# Altium PCB ir-kh.PcbDoc
Units mm, origin at the board's own origin, x right, y up, seen from the top; angles counter-clockwise.
Board outline 151 x 86.38 mm, 2 copper layers (Top Layer, Bottom Layer); 24 components, 20 nets, 69 pads, 0 vias.
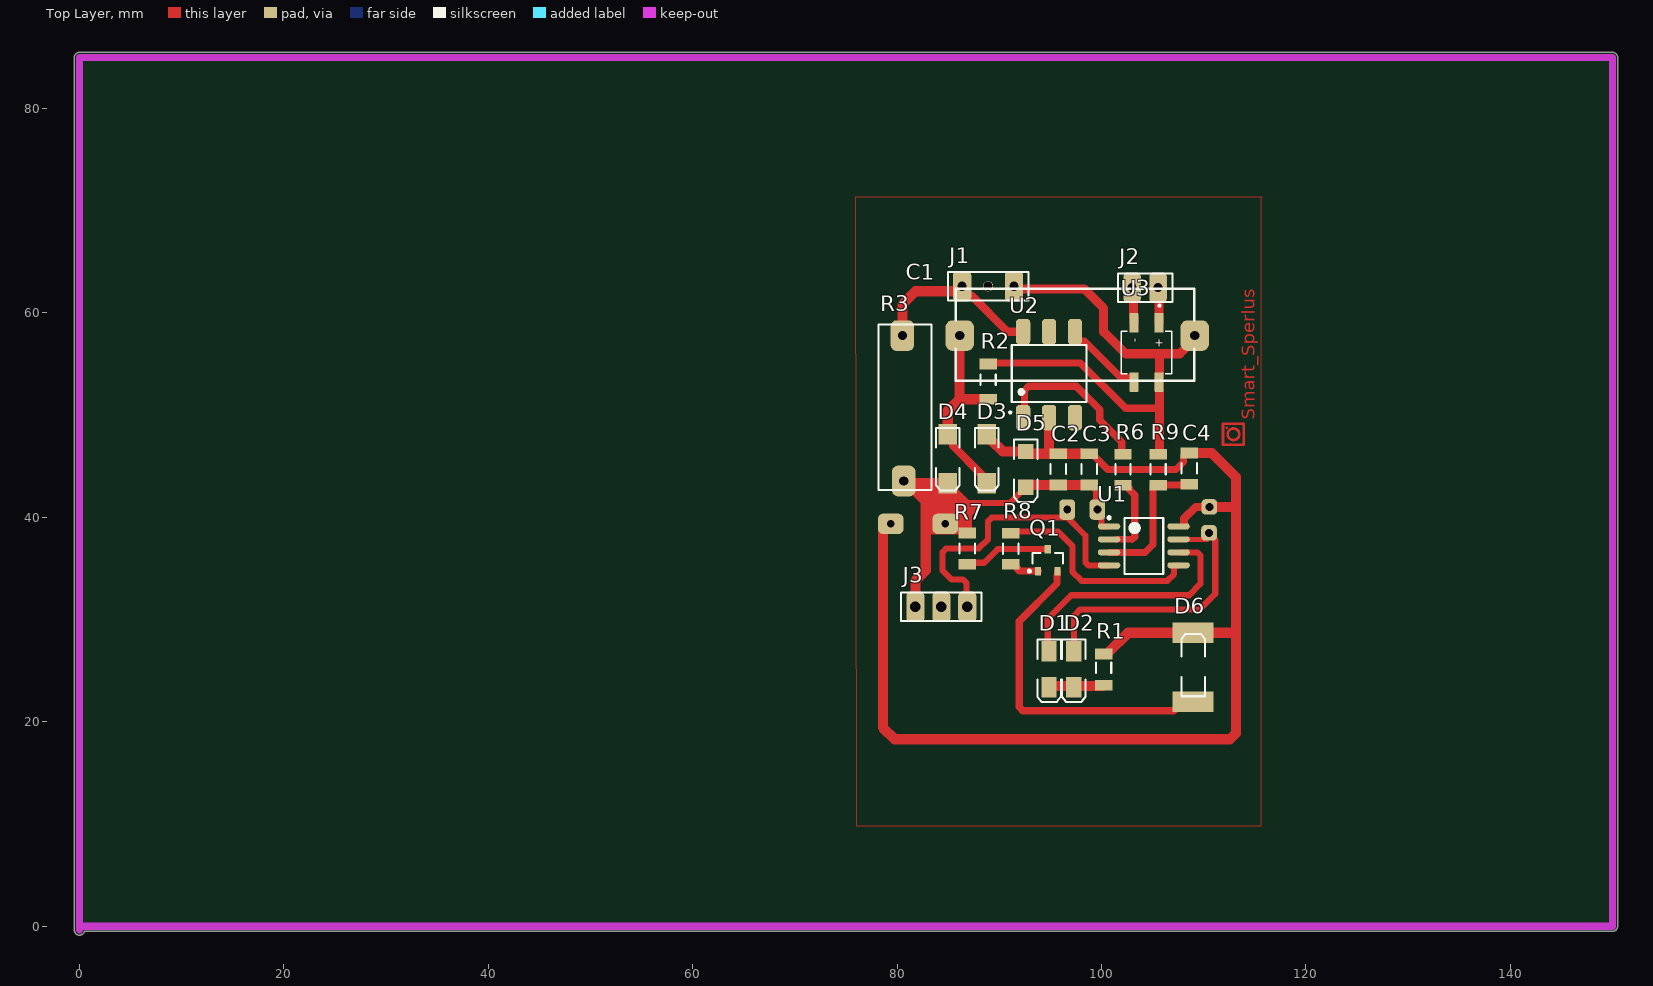
[diagram p0: Top Layer view]
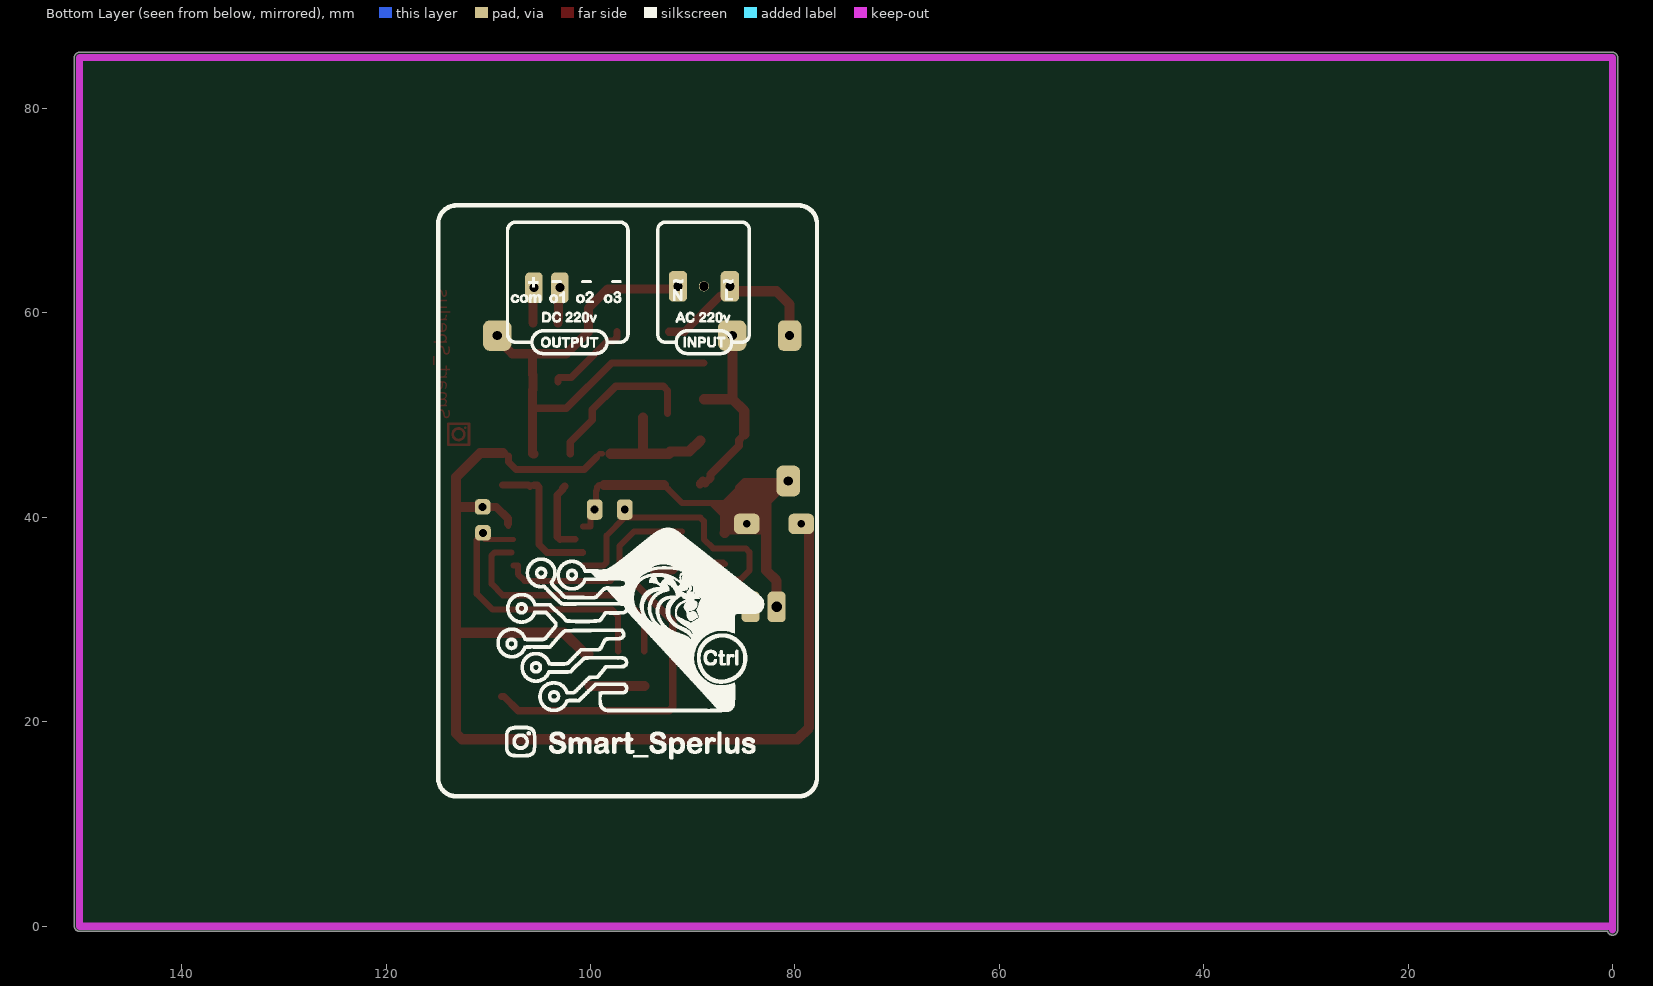
[diagram p1: Bottom Layer view, seen from below]
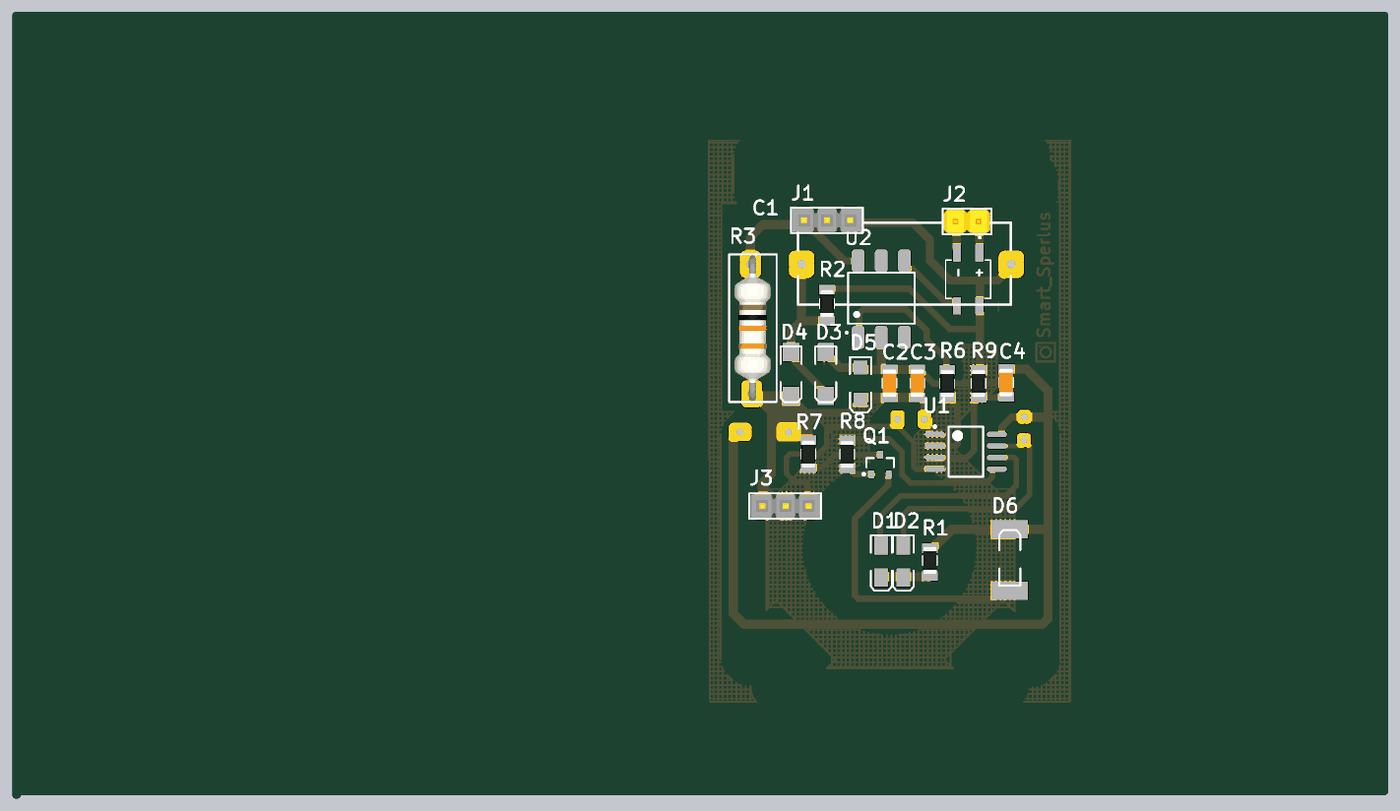
[diagram p2: 3D render of the assembled board from above, using the file's embedded part models]

## Layer stack, top to bottom
Top Solder: solder mask 0.0102, Solder Resist, Dk 3.5
Top Layer: signal copper 0.0356
Dielectric 1: dielectric 0.32, FR-4, Dk 4.8
Bottom Layer: signal copper 0.0356
Bottom Solder: solder mask 0.0102, Solder Resist, Dk 3.5

## Board outline
-0.5,-0.381 -0.5,85 cw(c0,85) 0,85.5 150,85.5 cw(c150,85) 150.5,85 150.5,0 cw(c150,0) 150,-0.5 0.486,-0.5 cw(c0,-0.381)

## Design rules (kind name [scope] priority, off if disabled: settings)
Clearance Clearance_1 [InPolygon] p1: gap=1 ignorepadtopadclearanceinfootprint=FALSE
Clearance [All] p2: gap=0.6 ignorepadtopadclearanceinfootprint=FALSE
PolygonConnect [All] p1: connectstyle=Relief reliefconductorwidth=0.254 reliefentries=4 polygonreliefangle="90 Angle" airgapwidth=0.254
RoomDefinition ir-kh [InComponentClass('ir-kh')] p1: confinementstyle=ConfineIn formatcopy=TRUE lockcomponents=FALSE outline 144.907,-4.953 247.904,-4.953 247.904,23.114 144.907,23.114
RoutingLayers [All] p1: top layer_v5=FALSE bottom layer_v5=TRUE
RoutingVias [All] p1: holewidth=0.711 width=2.5 viastyle="Through Hole" minholewidth=0.711 minwidth=1.27 maxholewidth=0.711 maxwidth=2
SolderMaskExpansion [All] p1: expansion=0.102 istentingtop=FALSE
Width [All] p1: maxlimit=3 minlimit=0.5 preferedwidth=1
29 further rules are at their usual default settings.

## Components (designator, comment, footprint, x,y, rotation, side; value= is the part's Value field where it differs from the comment)
C1 "1uf 400v" "1uf 400v" 109.728,62.357 r180 top value=1uF
C2 "=Value" "CAP 1206"#1 95.758,44.704 r90 top
C3 "=Value" "CAP 1206"#1 98.806,44.704 r90 top
C4 "=Value" "CAP 1206"#2 108.585,44.831 r270 top
D1 "LED2" 3.2X1.6X1.1#1 94.869,25.146 r270 top
D2 "LED2" 3.2X1.6X1.1#1 97.282,25.146 r270 top
D3 "D Tunnel1" 3.2X1.6X1.1#2 88.773,45.847 r270 top
D4 "D Tunnel1" 3.2X1.6X1.1#2 84.963,45.847 r270 top
D5 "D Tunnel1" 3.2X1.6X1.1#3 92.583,44.704 r270 top
D6 "LED2" 3.2X1.6X1.1#4 108.966,25.4 r90 top
J1 "Header3X1" "HEADER 3X1"#1 86.36,62.611 r0 top
J2 "Header2X1" "Header 2X1" 104.267,62.484 r0 top
J3 "Header3X1" "HEADER 3X1"#2 81.788,31.242 r0 top
Q1 "QNPN" SOT-23B_L 94.742,35.814 r90 top
R1 "10K" "RES 1206 (3216X08L)"#1 100.203,25.273 r90 top
R2 "10K" "RES 1206 (3216X08L)"#2 88.9,53.467 r270 top
R3 "10K" Res-(2/1) 80.772,60.071 r270 top
R6 "10K" "RES 1206 (3216X08L)"#3 102.108,44.704 r270 top
R7 "10K" "RES 1206 (3216X08L)"#4 86.868,36.957 r90 top
R8 "10K" "RES 1206 (3216X08L)"#4 91.114,36.921 r270 top
R9 "10K" "RES 1206 (3216X08L)"#3 105.537,44.704 r270 top
U1 "ATtiny15L-1SC" 8S2_N 104.14,37.211 r0 top
U2 "K3021P" DIP762W50P254L730H410Q6 94.869,54.068 r90 top
U3 "MB6S" SOIC245P670X270-4N 104.394,56.134 r270 top

## Footprints (in the part's own frame and the unit in brackets; to place one, negate y for a bottom-side part, rotate by r counter-clockwise, add the part's x,y. Pads: shape width x height; smd on the part's side, far side on the other; paste and mask are expansions set on the pad)
"1uf 400v" [mm] "24*9mm"
  rrect50% 2.8x3 hole 0.9: 1(0.601,4.572) 2(23.601,4.572)
  silkscreen extent 0.63,0 24,9
3.2X1.6X1.1#1 [mm] "SMT LED; 2 Flat Leads"
  rect 2x1.5 smd: 1(-1.75,0) 2(1.75,0)
  silkscreen extent -2.9,-1.15 3.2,1.15
3.2X1.6X1.1#2 [mm] "SMT LED; 2 Flat Leads"
  rect 2x1.8 smd: 1(-2.296,0) 2(2.504,0)
  silkscreen extent -2.9,-1.15 3.2,1.15
3.2X1.6X1.1#3 [mm] "SMT LED; 2 Flat Leads"
  rect 1.5x1.5 smd: 1(-1.75,0) 2(1.75,0)
  silkscreen extent -2.9,-1.15 3.2,1.15
3.2X1.6X1.1#4 [mm] "SMT LED; 2 Flat Leads"
  rect 2x4 smd: 1(-3.429,0) 2(3.302,0)
  silkscreen extent -2.9,-1.15 3.2,1.15
8S2_N [mm] "SOP, 8-Leads, Body 5.3x5.3mm, Pitch 1.27mm, IPC Medium Density"
  oval 2.2x0.6 smd: 1(-3.4,1.905) 2(-3.4,0.635) 3(-3.4,-0.635) 4(-3.4,-1.905) 5(3.4,-1.905) 6(3.4,-0.635) 7(3.4,0.635) 8(3.4,1.905)
  silkscreen extent -3.52,-2.75 1.9,2.88, body extent -2.73,-2.75 2.73,2.75, height 2.16
"CAP 1206"#1 [mm]
  rect 1.05x1.7 smd: 1(-1.533,0) 2(1.517,0)
  silkscreen extent -0.47,-0.75 0.53,0.75, body extent -1.49,-0.77 1.55,0.75, height 0.75
"CAP 1206"#2 [mm]
  rect 1.05x1.7 smd: 1(-1.461,0) 2(1.589,0)
  silkscreen extent -0.47,-0.75 0.53,0.75, body extent -1.49,-0.77 1.55,0.75, height 0.75
DIP762W50P254L730H410Q6 [mm]
  rrect50% 2.5x1.4 smd: 1(-4.302,2.54) 2(-4.302,0) 3(-4.302,-2.54) 4(4.098,-2.54) 5(4.098,0) 6(4.098,2.54)
  silkscreen extent -3.9,-3.65 2.8,3.9
"Header 2X1" [mm]
  rrect50% 1.7x3 hole 0.9: 1(-1.27,0) 2(1.27,0)
  silkscreen extent -2.67,-1.4 2.67,1.4, body extent -2.54,-1.27 2.54,1.27, height 9.5
"HEADER 3X1"#1 [mm]
  rrect50% 1.8x3 hole 0.9: 1(0,0) 3(5.08,0)
  round 1 hole 0.9: 2(2.54,0)
  silkscreen extent -1.4,-1.4 6.48,1.4, body extent -1.24,-1.27 6.38,1.27, height 8.38
"HEADER 3X1"#2 [mm]
  rrect50% 1.778x3 hole 1.016: 1(0,0) 2(2.54,0) 3(5.08,0)
  silkscreen extent -1.4,-1.4 6.48,1.4, body extent -1.24,-1.27 6.38,1.27, height 8.38
"RES 1206 (3216X08L)"#1 [mm] "Chip Resistor, 2-Leads, Body 3.2x1.6mm, IPC High Density _ (0.125 W)"
  rect 1.05x1.7 smd: 1(-1.691,0) 2(1.359,0)
  silkscreen extent -0.5,-0.75 0.5,0.75, body extent -1.52,-0.76 1.53,0.76, height 0.6
"RES 1206 (3216X08L)"#2 [mm] "Chip Resistor, 2-Leads, Body 3.2x1.6mm, IPC High Density _ (0.125 W)"
  rect 1.05x1.7 smd: 1(-1.533,0) 2(1.905,0)
  silkscreen extent -0.5,-0.75 0.5,0.75, body extent -1.52,-0.76 1.53,0.76, height 0.6
"RES 1206 (3216X08L)"#3 [mm] "Chip Resistor, 2-Leads, Body 3.2x1.6mm, IPC High Density _ (0.125 W)"
  rect 1.05x1.7 smd: 1(-1.486,0) 2(1.564,0)
  silkscreen extent -0.5,-0.75 0.5,0.75, body extent -1.52,-0.76 1.53,0.76, height 0.6
"RES 1206 (3216X08L)"#4 [mm] "Chip Resistor, 2-Leads, Body 3.2x1.6mm, IPC High Density _ (0.125 W)"
  rect 1.05x1.7 smd: 1(-1.533,0) 2(1.517,0)
  silkscreen extent -0.5,-0.75 0.5,0.75, body extent -1.52,-0.76 1.53,0.76, height 0.6
Res-(2/1) [mm]
  rrect50% 3x2.3 hole 0.9: 1(2.286,-0.254) 2(16.51,-0.127)
  silkscreen extent 1.2,-2.6 17.4,2.6, body extent 1.28,-1.98 17.32,1.92, height 7.03
SOIC245P670X270-4N [mm]
  rrect23% 1.91x0.91 smd: 1(-2.9,1.225) 2(-2.9,-1.225) 3(2.9,-1.225) 4(2.9,1.225)
  silkscreen extent -4.68,-2.48 2.1,2.48
SOT-23B_L [mm] "SOT23, 3-Leads, Body 2.9x1.3mm, Pitch 0.95mm, Lead Span 2.4mm, IPC High Density"
  rect 0.85x0.6 smd: 1(-1.075,0.95) 2(-1.075,-0.95) 3(1.075,0)
  silkscreen extent -1.2,-1.5 0.7,1.92, body extent -0.7,-1.5 0.7,1.5, height 1.14

## Part data
C1: "Capacitor 24*9mm", ComponentLinkURL=www.picpars.com, Designer="Seyed Mohsen Ghasemain"
C2 C3 C4: library part Capacitor, "Capacitor"
D1 D2 D6: "Typical RED, GREEN, YELLOW, AMBER GaAs LED", LatestRevisionDate=17-Jul-2002, LatestRevisionNote="Re-released for DXP Platform.", PackageDescription="SM LED; 2 Flat Leads", PackageReference=3.2X1.6X1.1, PackageVersion=Feb-2002, Published=8-Jun-2000, Publisher="Altium Limited"
D3 D4 D5: "Tunnel Diode - RLC Model", LatestRevisionDate=17-Jul-2002, LatestRevisionNote="Re-released for DXP Platform.", PackageDescription="SM LED; 2 Flat Leads", PackageReference=3.2X1.6X1.1, PackageVersion=Feb-2002, Published=8-Jun-2000, Publisher="Altium Limited"
Q1: "NPN Bipolar Transistor", LatestRevisionDate=29-May-2009, LatestRevisionNote="IPC-7351 Footprint Added.", PackageDescription="3-Pin SOT-23 Package 0.95 mm Pitch, 2.4 mm Lead Span", PackageReference=SOT-23B, PackageVersion=Aug-1999, Published=8-Jun-2000, Publisher="Altium Limited"
R1 R2 R3 R6 R7 R8 R9: library part Resistor, "Resistor", Power="1/4 W", Tolerance=5%
U1: "8-Bit AVR Microcontroller with 1K Byte of Flash Memory", Supplier Part Number 1=ATTINY15L-1SC-ND, ComponentLink1Description=Datasheet, ComponentLink1URL=http://www.atmel.com/dyn/resources/prod_documents/doc1187.pdf, ComponentLink2Description="Atmel.com Home", ComponentLink2URL=http://www.atmel.com, DatasheetVersion=1187E-AVR-06/02, LatestRevisionDate=16-Oct-2006, LatestRevisionNote="IPC-7351 Footprint Added.", PackageDescription="8-Lead, 0.208\" Body, Plastic Small Outline Package (EIAJ)", PackageReference=8S2, PackageVersion="revF, Apr-2008", Published=17-Sep-2003, Publisher="Altium Limited", Supplier 1=Digi-Key, Supplier 2=Mouser, Supplier Part Number 2=556-ATTINY15L1SC
U2: "Optoisolator Triac Output 5300Vrms 1 Channel 6-DIP", Package="DIP-6 Vishay", Availability=Unavailable, DigiKey-Purchase-URL=https://snapeda.com/shop?store=DigiKey&id=291595, MF="Vishay Semiconductor", Mouser-Purchase-URL=https://snapeda.com/shop?store=Mouser&id=291595, MP=K3021P, Price=None, SnapEDA_Link=https://www.snapeda.com/parts/K3021P/Vishay%20Semiconductor%20Opto%20Division/view-part/291595/?ref=snap
U3: "Bridge Rectifier Single Phase Standard 600V Surface Mount 4-SOIC", Package="BESOP-4 Surge Components", Digi-Key_Part_Number=MB6SCT-ND, Digi-Key_Purchase_URL=https://www.digikey.com.tr/product-detail/en/on-semiconductor/MB6S/MB6SCT-ND/965654?utm_source=snapeda&utm_medium=aggregator&utm_campaign=symbol, MF="ON Semiconductor", MP=MB6S, SnapEDA_Link=https://www.snapeda.com/parts/MB6S/ON%20Semiconductor/view-part/2774209/?ref=snap

## Free pads (board coordinates)
  rrect50% 2.5x2 hole 0.762: 4(84.709,39.37) 5(79.375,39.37)
  rrect50% 1.524x1.524 hole 0.762: 6(110.554,41.021) 7(110.519,38.481)
  rrect50% 1.524x2 hole 0.762: 8(99.597,40.767) 9(96.647,40.767)

## Nets (pads, with @x,y where several pads share a name; then routed paths per layer and width w, separated by ;. In a path a pad name is that pad's centre, name@x,y a point inside that pad or via, vN(x,y) a via of type N, cw(c..) or ccw(c..) an arc to the next point about the centre after c; other vN are vias at no path point)
GND: C2.2 C3.2 C4.1 D3.1 D5.1 D6.2 J3.2 pad.5 pad.6 R1.2 U1.8 U2.2 | length 130.1
  Top Layer w0.5: C3.2 99.131,46.221 99.406,45.946 C3.2@99.406,45.882 ; U1.8@108.024,39.116 U1.8@108.07,39.162
  Top Layer w0.7: C3.2@99.406,45.882 100.612,44.676 107.287,44.676 108.026,45.415 C4.1@108.026,46.017
  Top Layer w0.8: U1.8@108.077,39.37 108.077,39.878 109.22,41.021 pad.6
  Top Layer w1: pad.5 79.125,39.37 78.625,38.87 78.625,38.296 78.613,38.284 78.613,19.431 79.756,18.288 112.571,18.288 113.157,18.874 113.157,28.702 ; D3.1@89.263,47.516 90.325,46.454 91.952,46.454 D5.1@92.075,46.454 ; D5.1@92.202,46.454 D5.1@92.075,46.454 ; U2.2 94.869,46.221 ; C3.2@98.036,46.221 C2.2 94.869,46.221 ; R1.2 100.528,26.632 102.598,28.702 D6.2 113.157,28.702 ; C4.1 110.807,46.292 113.157,43.942 113.157,41.148 ; pad.6 113.03,41.021 113.157,41.148 ; D5.1@92.075,46.454 92.308,46.221 94.869,46.221 ; 113.157,28.702 113.157,41.148
ir-r: J3.3 pad.9 U1.4 | length 29.7
  Top Layer w0.6: J3.3@86.868,31.496 86.804,31.559 86.804,33.558 86.453,33.909 85.344,33.909 84.455,34.798 84.455,36.606 84.806,36.957 87.999,36.957 88.9,37.858 88.9,39.632 89.251,39.983 91.309,39.983 91.331,40.005 pad.9@96.647,40.005 ; pad.9@96.554,40.098 pad.9@96.647,40.005 ; pad.9@96.647,40.209 pad.9 ; U1.4 98.718,35.306 98.425,35.599 98.425,38.227 pad.9@96.647,40.005
ir-t: R8.1 U1.5 | length 21.1
  Top Layer w0.6: R8.1@91.059,38.617 95.749,38.617 97.155,37.211 97.155,34.671 98.044,33.782 106.426,33.782 107.101,34.457 107.101,35.306 U1.5
l1: D2.1 pad.7 U1.7 | length 27.2
  Top Layer w0.5: U1.7 pad.7@110.356,37.846
  Top Layer w0.6: D2.1 97.318,26.932 97.318,30.389 97.917,30.988 109.601,30.988 111.125,32.512 111.125,37.804 110.519,38.41 pad.7
l2: D1.1 U1.6 | length 24.4
  Top Layer w0.6: D1.1@94.742,26.896 94.742,30.099 97.028,32.385 108.585,32.385 109.683,33.483 109.683,36.283 109.39,36.576 U1.6@107.742,36.576
NetC1_2: C1.2 D3.2 D4.1 R2.2 | length 19
  Top Layer w0.8: D4.1@85.363,47.643 85.463,47.543 85.463,47.008 88.273,44.198 88.273,43.843 D3.2 ; D3.2@89.013,43.583 89.281,43.316 D3.2@89.281,43.216
  Top Layer w1: D4.1 84.963,50.419 86.106,51.562 R2.2 ; 86.106,51.689 86.106,57.764 C1.2
NetD1_2: D1.2 D2.2 R1.1 | length 8.1
  Top Layer w0.5: D1.2@94.742,23.396 D1.2 D2.2
  Top Layer w0.6: D2.2@97.189,23.489 D2.2 D2.2@97.375,23.489 ; R1.1@100.11,23.489 R1.1
  Top Layer w1: D1.2@94.742,23.489 D2.2@97.189,23.489 ; D2.2@97.375,23.489 R1.1@100.11,23.489
NetD6_1: D6.1 Q1.2 | length 32.4
  Top Layer w0.7: Q1.2@95.692,34.804 95.692,34.438 95.631,34.377 95.631,33.528 91.948,29.845 91.948,21.433 92.299,21.082 107.077,21.082 108.474,22.479 D6.1@108.712,22.479
NetJ2_1: J2.1 U3.2 | length 3.5
  Top Layer w0.9: J2.1 103.124,62.357 103.124,59.579 103.169,59.534 U3.2
NetJ2_2: J2.2 U3.1 | length 3.5
  Top Layer w0.9: J2.2@105.41,62.484 105.614,62.28 105.614,59.039 U3.1
NetQ1_1: Q1.3 R7.1 | length 8.5
  Top Layer w0.6: R7.1 87.009,35.565 88.51,35.565 89.839,36.894 Q1.3@94.742,36.894
NetQ1_2: Q1.1 R8.2 | length 3.1
  Top Layer w0.7: R8.2 91.439,35.404 91.714,35.129 91.714,35.032 92.007,34.739 Q1.1@93.842,34.739
NetR4_2: 
NetR6_1: R6.1 U2.1 | length 16
  Top Layer w0.7: U2.1@92.456,50.179 92.456,52.422 92.866,52.832 97.536,52.832 99.822,50.546 99.822,49.53 101.981,47.371 R6.1@101.981,46.19
NetU2_4: U2.4 U3.3 | length 8.3
  Top Layer w0.7: U2.4 97.409,57.616 97.759,57.266 98.309,57.266 101.875,53.7 103.064,53.7 103.169,53.595 U3.3
nol: C1.1 J1.3 R2.1 R9.1 U3.4 | length 51
  Top Layer w0.7: R2.1@88.9,55.118 97.917,55.118 102.362,50.673 105.701,50.673
  Top Layer w0.9: J1.3@91.567,62.357 98.298,62.357 100.203,60.452 100.203,58.166 102.362,56.007 105.664,56.007 ; R9.1 105.589,46.19 105.664,46.265 105.664,52.477 105.624,52.517 105.624,53.229 U3.4 105.624,53.239 105.624,53.951 105.664,53.991 105.664,56.007 ; C1.1@109.553,56.975 108.552,56.975 108.177,56.6 108.177,56.534 107.65,56.007 105.664,56.007
out: R6.2 U1.2 | length 7.1
  Top Layer w0.65: U1.2@101.515,37.846 102.997,37.846
  Top Layer w0.7: R6.2@102.52,43.053 102.708,42.865 102.708,42.738 103.251,42.195 103.251,38.1 102.997,37.846
vcc: C2.1 C3.1 D4.2 D5.2 J3.1 pad.4 pad.8 R3.2 R7.2 U1.1 | length 38.7
  Top Layer w0.6: 86.614,41.402 91.031,41.402 92.392,42.763 D5.2 ; C3.1 99.131,43.171 99.356,42.946 99.356,42.714 99.475,42.595 99.475,41.456 pad.8@99.881,41.051 ; pad.8 100.009,40.355 100.009,39.116 U1.1
  Top Layer w1: R3.2@81.384,43.343 82.804,43.343 ; J3.1@81.788,31.496 81.788,33.782 82.804,34.798 82.804,43.343 ; 86.833,40.802 86.833,38.499 86.858,38.474 R7.2 ; 86.833,41.183 85.363,42.653 85.363,42.843 84.863,43.343 82.804,43.343 ; D5.2@92.8,43.171 C2.1@95.123,43.171 ; C2.1@95.25,43.171 95.259,43.18 C3.1@98.679,43.18
vdd: J1.1 R3.1 U2.6 | length 17.4
  Top Layer w0.8: J1.1@86.233,62.111 86.633,61.711 87.26,61.711 90.805,58.166 U2.6
  Top Layer w1: R3.1 80.518,60.833 81.802,62.117 85.96,62.117 86.36,62.517 J1.1
zero: C4.2 R9.2 U1.3 | length 13.5
  Top Layer w0.65: U1.3 100.745,36.571 104.262,36.571 105.037,37.346
  Top Layer w0.7: 105.037,37.346 105.037,42.965 105.212,43.14 R9.2 ; R9.2@105.918,43.053 106.048,43.183 C4.2@108.585,43.183
pads on no net: J1.2 U2.3 U2.5
copper on no net: | length 11.7
  Top Layer w0.254: 111.887,47.117 113.919,47.117 113.919,49.149 111.887,49.149 111.887,47.117 ; 113.471,48.133 ccw(c112.903,48.133) 113.471,48.133

## Polygon pours and split planes (outlines as drawn)
GND on Top Layer "NONET_L01_P024" (hatched 90Degree grid 0.5 track 0.2, shelved, pour order 24): 75.946,71.374 115.697,71.374 115.57,71.247 115.57,9.779 76.073,9.779

## Keep-outs
Keep-Out Layer:
  lines w0.7: 0,-0.381 0,85 150,85 150,0 0,0

## Other copper
Top Layer:
  region net vcc: 84.963,43.343 86.777,41.529 88.392,41.529 88.519,41.402 87.249,40.132 87.249,38.608 86.868,38.227 86.741,38.354 83.185,38.354 83.185,40.513 81.407,42.291 81.407,43.301
  pour cut-out: 107.442,28.067 110.617,28.067 110.617,22.606 110.49,22.733 107.442,22.733
  text "Smart_Sperlus" at 115.014,49.53 h1.3 r90

## Silkscreen, mask and mechanical layers (free items; w line width, h text height)
Bottom Overlay:
  drawing of 14186 lines, arcs and shapes, not listed
Bottom Solder:
  lines w0.2: 76.454,17.018 76.454,67.31 115.062,67.31 115.062,17.018 76.454,17.018

## Text inside footprints (layer, text, board x,y; h text height)
U3: Top Overlay "-" at 102.994,57.534 h0.81 r270; Top Overlay "+" at 105.284,57.533 h0.81 r270